# Altium PCB Copy of UniversalBoard.PcbDoc (part 2 of 2)
Units mm, origin at the board's own origin, x right, y up, seen from the top; angles counter-clockwise.
Board outline 150 x 100 mm, 2 copper layers (Top Layer, Bottom Layer); 74 components, 82 nets, 428 pads, 86 vias.
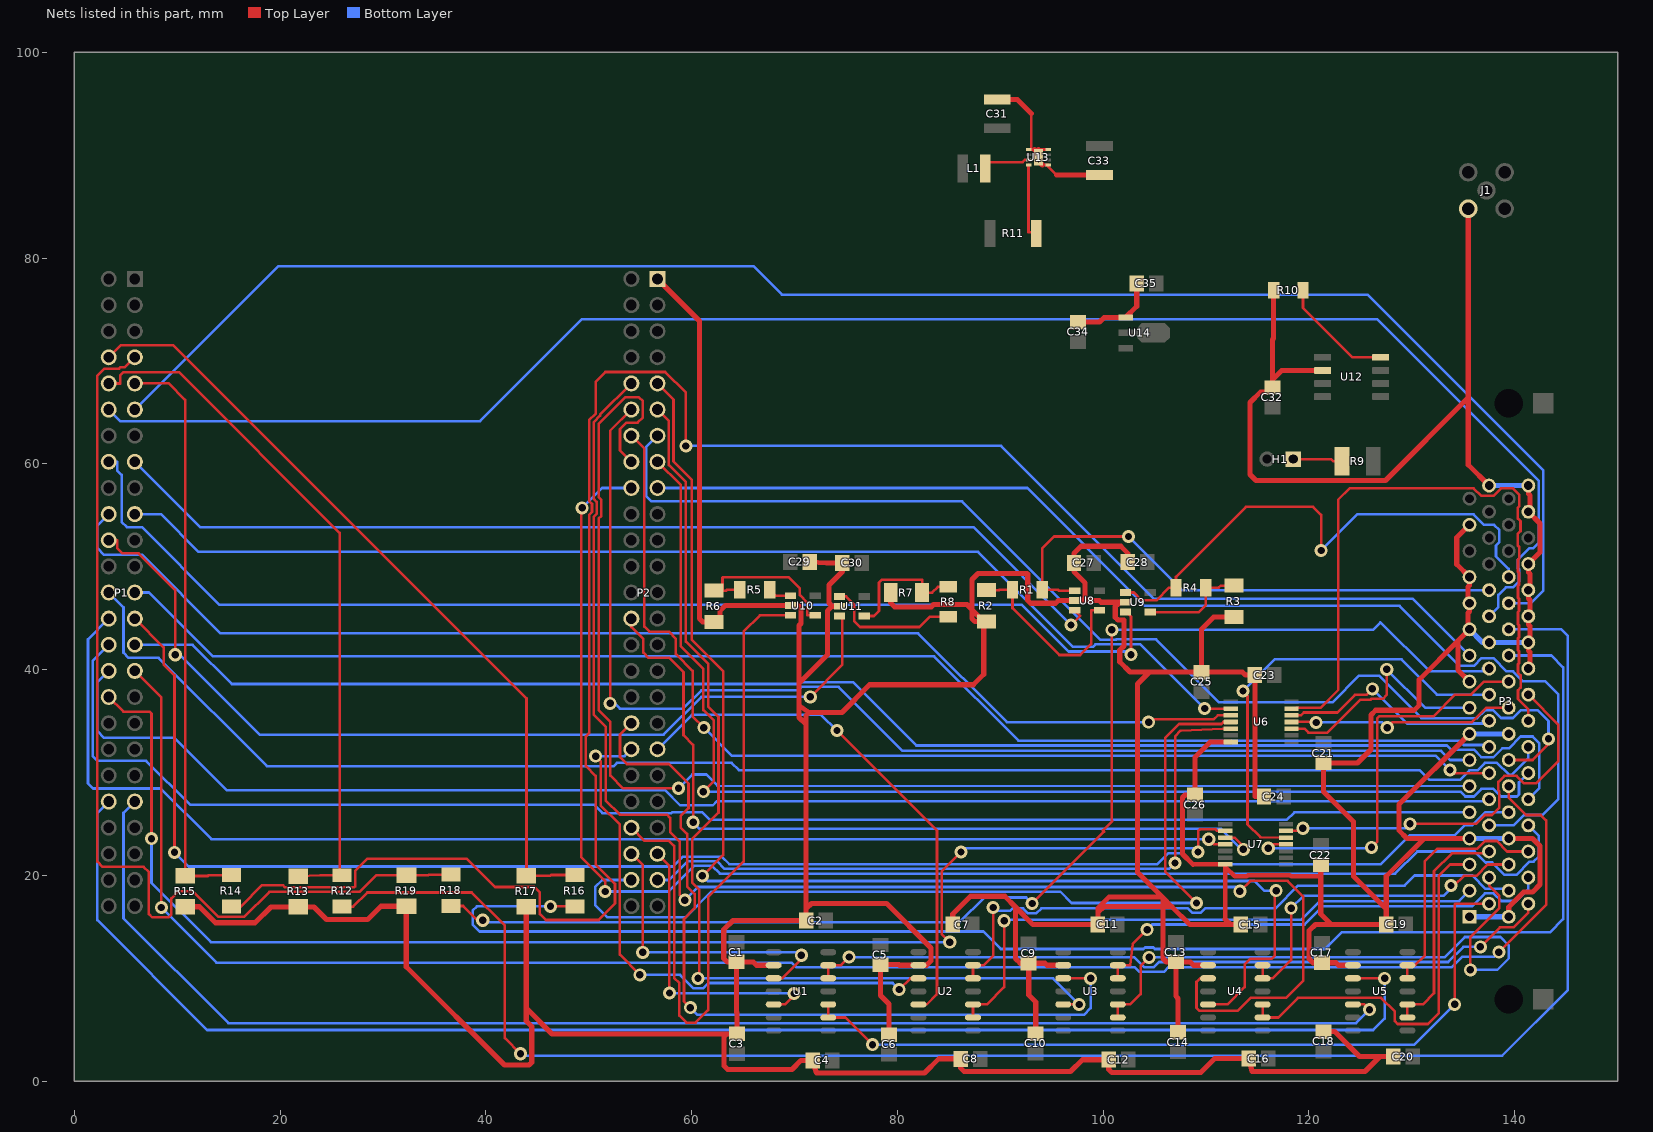
[diagram p2: the nets of this part, all layers, seen from the top]

## Via types
v1: diameter 1.27, hole 0.711, Top Layer to Bottom Layer, 79 vias
v2: diameter 1.8, hole 1.2, Top Layer to Bottom Layer, 5 vias
v3: diameter 0.5, hole 0.2, Top Layer to Bottom Layer, 2 vias

## Nets (pads, with @x,y where several pads share a name; then routed paths per layer and width w, separated by ;. In a path a pad name is that pad's centre, name@x,y a point inside that pad or via, vN(x,y) a via of type N, cw(c..) or ccw(c..) an arc to the next point about the centre after c; other vN are vias at no path point) (continued)
GND: C1.2 C2.2 C3.2 C4.2 C5.2 C6.2 C7.2 C8.2 C9.2 C10.2 C11.2 C12.2 C13.2 C14.2 C15.2 C16.2 C17.2 C18.2 C19.2 C20.2 C21.2 C22.2 C23.2 C24.2 C25.2 C26.2 C27.2 C28.2 C29.1 C30.2 C31.2 C32.2 C33.2 C34.1 C35.1 J1.3 P2.1 P3.1 P3.7 P3.15 P3.19 P3.22 P3.23 P3.25 P3.27 P3.31 P3.34 P3.35 P3.41 P3.49 P3.54 P3.56 P3.58 P3.60 P3.62 P3.66 P3.68 R2.2 R3.2 R6.2 R7.2 R10.2 R13.2 R15.2 R17.2 R19.2 U1.2 U2.2 U3.2 U4.2 U5.2 U6.7 U7.7 U8.2 U9.2 U10.2 U11.2 U12.2 U13.1 U13.4 U13.5 U13.9 U14.1 | length 819.7
  Top Layer w0.28: U13.5@92.758,90.553 U13.5@93.002,90.553 ; 93.002,94.069 U13.5@93.002,90.553 ; U13.9@93.318,90.553 U13.5@93.002,90.553 ; U13.9@93.708,90.576 94.539,90.576 94.539,90.553 U13.4@94.658,90.553 ; U13.9@94.106,89.053 U13.1@94.64,89.053 ; U13.1@94.658,89.053 U13.1@94.64,89.053 ; 95.45,88.09 94.64,88.9 U13.1@94.64,89.053
  Top Layer w0.45: 108.712,21.08 U7.7@111.862,21.08 ; 110.404,32.97 U6.7@112.4,32.97 ; 111.862,15.748 111.862,20.82 ; U7.7@111.87,21.08 U7.7@111.862,21.08 ; 121.15,19.906 118.275,19.906 118.147,20.034 114.072,20.034 113.943,19.906 112.776,19.906 111.862,20.82 ; 111.862,20.82 U7.7@111.862,21.08
  Top Layer w0.5: R15.2@10.77,16.95 12.157,16.95 13.711,15.396 17.557,15.396 19.101,16.94 R13.2@21.78,16.94 23.294,16.94 24.511,15.723 28.507,15.723 29.794,17.01 R19.2@32.258,17.01 ; R19.2@32.28,17.01 R19.2@32.258,17.01 ; R17.2@43.94,16.97 43.917,16.97 43.917,7.112 ; P2.1@56.678,77.981 60.757,73.902 60.757,44.958 61.08,44.635 R6.2@62.148,44.635 62.738,44.635 62.738,45.695 63.273,46.23 U10.2@69.612,46.23 70.381,46.23 70.637,45.974 70.637,44.501 70.434,44.298 70.434,38.684 ; U1.2@67.97,11.272 66.307,11.272 65.989,11.589 C1.2@64.35,11.589 ; C29.1@71.468,50.483 73.103,50.38 C30.2@74.65,50.38 74.65,49.53 73.355,48.235 73.355,46.475 73.66,46.17 ; U11.2@74.361,46.17 73.66,46.17 ; C6.2@79.18,4.521 79.18,7.493 78.35,8.323 C5.2@78.35,11.339 80.162,11.339 80.23,11.272 U2.2@82.044,11.272 82.829,11.272 83.269,11.712 83.269,12.954 78.951,17.272 71.637,17.272 71.129,16.764 ; R7.2@79.348,47.48 79.348,46.482 79.729,46.101 83.287,46.101 83.515,46.33 86.747,46.33 87.249,45.828 ; C7.2@85.369,15.22 85.369,16.256 87.089,17.976 90.424,17.976 91.465,16.935 ; R2.2@88.638,44.685 R2.2@88.392,44.685 ; C31.2@89.7,95.42 91.651,95.42 93.002,94.069 ; U13.9@93.318,90.553 93.701,90.17 93.701,89.459 U13.9@94.106,89.053 ; C10.2@93.44,4.621 93.44,7.696 92.76,8.376 C9.2@92.76,11.469 ; U13.9@93.708,89.803 v3(93.708,90.184) U13.9@93.708,90.576 ; 95.45,88.09 C33.2@99.63,88.09 ; U3.2@96.119,11.272 94.533,11.272 94.336,11.469 C9.2@92.76,11.469 ; C34.1@97.57,73.781 99.644,73.781 100.103,74.24 U14.1@102.18,74.24 103.256,75.316 C35.1@103.256,77.547 ; U9.2@102.169,46.55 101.49,46.55 ; C28.2@102.389,50.46 102.389,51.308 101.703,51.994 97.845,51.994 97.159,51.308 C27.2@97.159,50.38 97.159,49.526 98.247,48.438 98.247,46.99 97.977,46.72 ; C14.2@107.28,4.751 107.28,8.052 107.06,8.272 C13.2@107.06,11.599 ; 108.712,21.08 107.696,22.096 107.696,27.577 107.95,27.831 C26.2@108.93,27.831 108.93,31.496 110.404,32.97 ; U4.2@110.193,11.272 108.786,11.272 108.458,11.599 C13.2@107.06,11.599 ; 111.862,15.748 112.39,15.22 ; R3.2@112.7,45.125 110.744,45.125 109.57,43.951 C25.2@109.57,39.771 ; C15.2@113.359,15.22 112.39,15.22 ; C24.2@115.629,27.67 114.739,27.67 C23.2@114.739,39.473 113.818,39.473 113.52,39.771 C25.2@109.57,39.771 ; R10.2@116.565,76.88 116.565,72.203 116.447,72.085 116.447,68.182 ; C22.2@121.15,21.019 121.15,19.906 121.15,16.256 122.166,15.24 ; U12.2@121.325,69.083 117.348,69.083 116.447,68.182 ; C18.2@121.43,4.821 122.496,4.821 124.917,2.4 126.898,2.4 ; U5.2@124.267,11.272 122.879,11.272 122.631,11.519 C17.2@121.25,11.519 120.396,11.519 120.015,11.9 120.015,14.63 120.625,15.24 122.166,15.24 ; C20.2@128.199,2.4 126.898,2.4 ; v2(135.484,84.81) 135.484,66.447 ; P3.7@135.605,23.6 131.194,23.6 ; P3.15@135.605,33.76 128.734,26.889 128.734,24.384 129.519,23.6 131.194,23.6 ; P3.19@135.605,38.84 134.468,39.977 134.468,42.782 ; P3.31@135.605,54.08 134.366,52.841 134.366,50.239 P3.27@135.605,49 135.605,48.201 135.443,48.039 135.443,46.622 P3.25@135.605,46.46 135.605,45.661 135.443,45.499 135.443,44.082 P3.23@135.605,43.92 134.468,42.782 ; P3.34@137.51,57.89 135.484,59.915 135.484,66.447 ; P3.35@139.415,15.98 139.415,16.929 140.364,17.878 140.364,17.885 140.854,18.375 141.732,18.375 142.469,19.111 142.469,22.86 141.729,23.6 P3.41@139.415,23.6 ; P3.54@141.32,40.11 141.482,40.272 141.482,41.689 141.32,41.851 P3.56@141.32,42.65 141.482,42.812 141.482,44.229 141.32,44.391 P3.58@141.32,45.19 141.482,45.352 141.482,46.769 141.32,46.931 P3.60@141.32,47.73 141.482,47.892 141.482,49.309 141.32,49.471 P3.62@141.32,50.27 142.469,51.418 142.469,54.201 P3.66@141.32,55.35 141.482,55.512 141.482,56.929 141.32,57.091 P3.68@141.32,57.89 ; R19.2@32.258,17.01 32.258,11.125 41.808,1.575 44.196,1.575 44.45,1.829 44.45,5.309 43.917,5.842 43.917,7.112 ; 43.917,7.112 46.437,4.592 63.418,4.592 ; 63.418,4.592 C3.2@64.39,4.592 64.39,6.655 64.35,6.695 C1.2@64.35,11.589 ; 63.418,4.592 63.144,4.318 63.144,1.499 63.5,1.143 69.75,1.143 70.637,2.03 C4.2@71.759,2.03 72.14,0.787 82.631,0.787 84.023,2.18 C8.2@86.159,2.18 86.159,1.27 86.489,0.94 96.825,0.94 97.975,2.09 C12.2@100.539,2.09 100.539,1.137 100.838,0.838 109.474,0.838 110.826,2.19 C16.2@114.159,2.19 114.464,0.94 125.438,0.94 126.898,2.4 ; C1.2@64.35,11.589 63.468,11.589 63.119,11.938 63.119,14.732 64.007,15.62 C2.2@71.129,15.62 71.129,16.764 ; 70.434,36.525 70.434,35.357 71.129,34.662 ; 70.434,36.525 71.409,35.839 ; 70.434,36.525 70.434,38.684 ; 70.434,38.684 73.203,41.453 73.203,45.72 73.653,46.17 73.66,46.17 ; 71.129,16.764 71.129,34.662 ; 71.129,34.662 71.129,35.56 71.409,35.839 ; 71.409,35.839 74.6,35.839 77.292,38.532 87.376,38.532 88.392,39.548 R2.2@88.392,44.685 ; 87.249,45.828 87.249,48.768 87.833,49.352 92.583,49.352 92.659,49.276 92.659,46.736 92.939,46.457 95.377,46.457 95.64,46.72 U8.2@97.239,46.72 97.977,46.72 ; 87.249,45.828 87.249,44.958 87.522,44.685 R2.2@88.392,44.685 ; 87.249,45.828 R2.2@88.392,44.685 ; 91.465,16.935 93.16,15.24 C11.2@99.479,15.24 99.479,16.37 ; 91.465,16.935 91.465,11.938 91.934,11.469 C9.2@92.76,11.469 ; 97.977,46.72 99.619,46.72 99.789,46.55 101.49,46.55 ; 99.479,16.37 99.479,16.815 100.584,17.92 105.719,17.92 ; 99.479,16.37 100.076,16.967 105.816,16.967 ; 101.49,46.55 101.49,46.375 101.432,46.375 101.169,46.111 101.169,45.089 101.432,44.825 102.016,44.825 102.016,42.311 101.614,41.909 101.614,40.773 102.616,39.771 104.49,39.771 ; 104.49,39.771 103.327,38.608 103.327,20.312 105.719,17.92 ; 104.49,39.771 C25.2@109.57,39.771 ; 105.719,17.92 105.816,17.823 ; 105.816,16.967 105.816,17.823 ; 105.816,16.967 105.816,11.938 106.155,11.599 C13.2@107.06,11.599 ; 105.816,16.967 106.672,16.967 ; 105.816,17.823 106.672,16.967 ; 106.672,16.967 108.419,15.22 112.39,15.22 ; 116.447,68.182 C32.2@116.447,67.427 116.447,67.005 115.316,67.005 114.276,65.965 114.276,58.972 114.853,58.395 127.432,58.395 135.484,66.447 ; 122.166,15.24 C19.2@127.509,15.24 127.509,16.737 ; 127.509,16.737 127.509,19.915 131.194,23.6 ; 127.509,16.737 124.333,19.914 124.333,25.22 121.41,28.143 C21.2@121.41,30.939 124.714,30.939 126.025,32.25 126.025,35.592 126.492,36.059 130.224,36.059 130.708,36.543 130.708,39.023 134.468,42.782
  Bottom Layer w0.5: P3.1@135.605,15.98 P3.35@139.415,15.98 ; P3.7@135.605,23.6 P3.41@139.415,23.6 ; P3.15@135.605,33.76 P3.49@139.415,33.76 ; P3.23@135.605,43.92 136.875,42.65 P3.22@137.51,42.65 P3.56@141.32,42.65 ; P3.34@137.51,57.89 P3.68@141.32,57.89
  other v3: 93.708,89.403
NetH1_1: H1.1 R9.2 | length 4.8
  Top Layer w0.254: H1.1@118.47,60.47 122.14,60.47 122.35,60.26 R9.2@123.195,60.26
NetL1_1: L1.1 U13.7 | length 4.9
  Top Layer w0.254: L1.1@88.54,88.72 88.54,89.332 92.177,89.332 92.398,89.553 U13.7@92.758,89.553
NetP1_7: P1.7 R18.1 R19.1 | length 95.3
  Top Layer w0.254: P1.7@5.878,70.361 4.894,69.377 4.459,69.377 4.322,69.24 2.896,69.24 2.235,68.58 2.235,21.336 2.743,20.828 6.731,20.828 7.239,20.32 7.239,16.256 7.569,15.926 9.144,15.926 9.423,16.205 9.423,17.78 10.109,18.466 11.503,18.466 13.995,15.973 16.51,15.973 18.946,18.409 27.723,18.409 29.324,20.01 R19.1@32.28,20.01 34.392,20.01 34.467,20.085 R18.1@36.6,20.085
NetP1_8: P1.8 R16.1 R17.1 | length 77.3
  Top Layer w0.254: P1.8@3.338,70.361 4.529,71.552 9.601,71.552 43.942,37.211 R17.1@43.942,19.97 ; R17.1@43.94,19.97 R17.1@43.942,19.97 ; R16.1@48.65,20.045 46.328,20.045 46.253,19.97 R17.1@43.942,19.97
NetP1_9: P1.9 R14.1 R15.1 | length 56.4
  Top Layer w0.254: P1.9@5.878,67.821 5.878,67.843 9.144,67.843 10.77,66.218 R15.1@10.77,19.95 12.954,19.95 13.029,20.025 R14.1@15.25,20.025
NetP1_10: P1.10 R12.1 R13.1 | length 67.4
  Top Layer w0.254: P1.10@3.338,67.821 4.47,67.821 4.47,68.618 4.775,68.923 10.16,68.923 25.781,53.302 R12.1@25.781,20.015 ; R13.1@21.78,19.94 23.926,20.015 R12.1@25.781,20.015 ; R12.1@26.03,20.015 R12.1@25.781,20.015
NetP1_11: P1.11 P3.59 | length 166.5
  Bottom Layer w0.254: P1.11@5.878,65.281 19.82,79.223 66.015,79.223 68.783,76.454 125.705,76.454 142.776,59.383 142.776,47.678 141.557,46.46 P3.59@139.415,46.46
NetP1_12: P1.12 P3.24 | length 165.9
  Bottom Layer w0.254: P1.12@3.338,65.281 4.459,64.16 39.446,64.16 49.352,74.066 126.619,74.066 142.322,58.363 142.322,52.324 141.814,51.816 141.449,51.816 140.318,50.685 140.318,49.855 140.417,49.756 140.417,48.585 139.83,47.998 139.137,47.998 138.405,47.265 138.405,46.084 P3.24@137.51,45.19
NetP1_15: P1.15 U8.3 | length 99.6
  Top Layer w0.254: v1(96.876,44.348) 97.769,45.241 U8.3@97.239,45.77
  Bottom Layer w0.254: P1.15@5.878,60.201 12.231,53.848 87.376,53.848 v1(96.876,44.348)
NetP1_16: P1.16 U9.3 | length 114.7
  Top Layer w0.254: U9.3@102.169,45.6 102.26,45.6 102.699,45.162 v1(102.699,41.46)
  Bottom Layer w0.254: P1.16@3.338,60.201 4.166,60.201 4.166,59.36 4.597,58.928 4.597,54.356 5.105,53.848 6.579,53.848 14.122,46.304 92.088,46.304 96.628,41.764 102.14,41.764 102.444,41.46 v1(102.699,41.46)
NetP1_19: P1.19 U6.2 | length 114.6
  Top Layer w0.254: v1(109.855,36.22) U6.2@112.4,36.22
  Bottom Layer w0.254: P1.19@5.878,55.121 8.404,55.121 12.065,51.46 87.836,51.46 97.079,42.218 99.009,42.218 99.245,42.454 101.426,42.454 101.458,42.486 103.589,42.486 v1(109.855,36.22)
NetP1_20: P1.20 U6.3 | length 121.2
  Top Layer w0.254: v1(104.419,34.9) 104.698,35.178 110.744,35.178 111.136,35.57 U6.3@112.4,35.57
  Bottom Layer w0.254: P1.20@3.338,55.121 2.235,54.018 2.235,51.816 2.896,51.156 6.604,51.156 14.224,43.536 82.017,43.536 90.653,34.9 v1(104.419,34.9)
NetP1_22: P1.22 U11.3 | length 91.1
  Top Layer w0.254: P1.22@3.338,52.581 4.166,52.581 4.166,51.816 4.674,51.308 6.248,51.308 9.804,47.752 v1(9.804,41.453) ; v1(71.526,37.363) 74.625,40.462 74.625,45.22 U11.3@74.361,45.22
  Bottom Layer w0.254: v1(9.804,41.453) 10.236,41.453 18.009,33.68 57.277,33.68 60.96,37.363 v1(71.526,37.363)
NetP1_25: P1.25 P3.14 | length 138
  Bottom Layer w0.254: P1.25@5.878,47.501 7.254,47.501 13.455,41.3 83.566,41.3 91.77,33.096 134.614,33.096 135.034,32.676 137.011,32.676 137.011,32.49 P3.14@137.51,32.49
NetP1_26: P1.26 P3.48 | length 151.3
  Bottom Layer w0.254: P1.26@3.338,47.501 4.775,46.064 4.775,41.656 5.283,41.148 8.179,41.148 18.699,30.628 52.432,30.628 52.74,30.937 63.881,30.937 64.592,30.226 130.755,30.226 131.692,29.289 134.668,29.289 135.596,30.218 136.361,30.218 137.095,30.952 138.266,30.952 139.423,29.794 139.718,29.794 141.32,31.396 P3.48@141.32,32.49
NetP1_27: P1.27 P3.43 | length 158.3
  Top Layer w0.254: P1.27@5.878,44.961 8.68,42.159 8.68,40.491 9.728,39.442 v1(9.728,22.25)
  Bottom Layer w0.254: v1(9.728,22.25) 11.106,20.872 58.204,20.872 59.166,21.834 62.906,21.834 63.652,21.088 105.267,21.088 106.35,22.171 107.626,22.171 108.709,21.088 126.981,21.088 129.781,23.888 134.149,23.888 135.153,24.892 135.876,24.892 137.124,26.14 P3.43@139.415,26.14
NetP1_28: P1.28 U7.4 | length 129.8
  Top Layer w0.254: v1(110.261,23.52) 110.752,23.03 U7.4@111.87,23.03
  Bottom Layer w0.254: P1.28@3.338,44.961 1.321,42.944 1.321,28.956 1.829,28.448 8.382,28.448 13.31,23.52 v1(110.261,23.52)
NetP1_29: P1.29 P3.44 | length 148.2
  Bottom Layer w0.254: P1.29@5.878,42.421 11.492,42.421 15.305,38.608 70.244,38.608 70.416,38.779 75.69,38.779 81.84,32.629 133.42,32.629 133.827,32.222 136.02,32.222 136.754,31.488 137.925,31.488 138.786,32.348 139.421,32.348 140.575,33.503 141.732,33.503 142.39,32.844 142.39,28.48 P3.44@141.32,27.41
NetP1_30: P1.30 P3.9 | length 148.2
  Bottom Layer w0.254: P1.30@3.338,42.421 1.778,40.861 1.778,31.598 2.235,31.14 6.985,31.14 11.252,26.873 50.521,26.873 51.333,26.06 58.027,26.06 58.122,26.155 61.014,26.155 61.77,25.4 117.837,25.4 118.576,26.14 P3.9@135.605,26.14
NetP1_31: P1.31 P3.45 | length 177.8
  Top Layer w0.254: P1.31@5.878,39.881 8.458,37.301 v1(8.458,16.891) ; v1(138.455,12.548) 143.053,17.145 143.053,25.338 142.519,25.872 141.1,25.872 139.415,27.557 P3.45@139.415,28.68
  Bottom Layer w0.254: v1(8.458,16.891) 13.818,11.532 69.716,11.532 70.17,11.078 103.054,11.078 103.508,10.624 105.886,10.624 106.34,11.078 133.879,11.078 134.885,12.084 137.992,12.084 v1(138.455,12.548)
NetP1_32: P1.32 P3.10 | length 144.8
  Bottom Layer w0.254: P1.32@3.338,39.881 2.235,38.778 2.235,34.036 2.896,33.376 9.728,33.376 14.808,28.296 57.407,28.296 58.88,26.822 62.049,26.822 62.43,27.203 137.304,27.203 P3.10@137.51,27.41
NetP1_34: P1.34 U7.2 | length 139.3
  Top Layer w0.254: P1.34@3.338,37.341 4.763,35.916 7.315,35.916 7.493,35.738 v1(7.493,23.571) ; v1(85.087,13.513) 84.3,14.3 84.3,20.394 v1(86.182,22.276) ; v1(109.22,22.276) 109.22,24.308 109.398,24.486 110.922,24.486 111.077,24.33 U7.2@111.87,24.33
  Bottom Layer w0.254: v1(7.493,23.571) 7.493,19.279 13.259,13.513 v1(85.087,13.513) ; v1(86.182,22.276) 86.531,22.625 108.871,22.625 v1(109.22,22.276)
NetP1_41: P1.41 U5.5 | length 139.5
  Top Layer w0.254: U5.5@124.267,7.462 125.374,7.462 v1(125.882,6.954)
  Bottom Layer w0.254: P1.41@5.878,27.181 4.775,26.078 4.775,15.824 14.961,5.639 124.568,5.639 v1(125.882,6.954)
NetP1_42: P1.42 U5.3 | length 149
  Top Layer w0.254: U5.3@124.267,10.002 v1(127.356,10.002)
  Bottom Layer w0.254: P1.42@3.338,27.181 2.235,26.078 2.235,15.646 12.903,4.978 126.238,4.978 127.356,6.096 v1(127.356,10.002)
NetP2_9: P2.9 U4.5 | length 123.8
  Top Layer w0.254: P2.9@56.678,67.821 58.234,66.265 58.234,60.232 59.995,58.471 59.995,42.926 63.059,39.862 63.059,21.987 v1(61.036,19.964) ; U4.5@110.193,7.462 112.059,7.462 113.741,9.144 113.741,11.354 114.3,11.913 116.383,11.913 116.662,12.192 116.662,18.372 v1(116.81,18.52)
  Bottom Layer w0.254: v1(61.036,19.964) 61.544,19.456 114.706,19.456 115.643,18.52 v1(116.81,18.52)
NetP2_10: P2.10 U4.3 | length 143.8
  Top Layer w0.254: P2.10@54.138,67.821 51.112,64.795 51.112,64.683 50.496,64.067 50.496,56.586 50.768,56.314 50.768,55.141 50.496,54.869 50.496,35.611 51.638,34.469 51.638,27.301 53.032,25.908 57.582,25.908 57.905,25.584 57.905,24.231 58.826,23.31 58.826,18.11 v1(59.334,17.602) ; U4.3@110.193,10.002 109.417,10.002 109.068,9.652 109.068,7.112 109.347,6.833 113.055,6.833 114.325,8.103 117.78,8.103 119.431,9.754 119.431,17.969 117.918,19.482 114.3,19.482 v1(113.284,18.466)
  Bottom Layer w0.254: v1(59.334,17.602) 60.604,18.872 112.878,18.872 v1(113.284,18.466)
NetP2_11: P2.11 U3.5 | length 98.8
  Top Layer w0.254: P2.11@56.678,65.281 57.78,64.179 57.78,59.898 59.436,58.242 59.436,42.723 61.62,40.538 61.62,36.392 62.605,35.408 62.605,26.108 60.046,23.549 60.046,19.304 60.75,18.599 60.75,10.141 v1(60.611,10.001) ; U3.5@96.119,7.462 v1(97.663,7.462)
  Bottom Layer w0.254: v1(60.611,10.001) 95.123,10.001 v1(97.663,7.462)
NetP2_12: P2.12 P3.13 | length 117
  Top Layer w0.254: v1(52.08,36.73) 52.08,63.223 P2.12@54.138,65.281
  Bottom Layer w0.254: v1(52.08,36.73) 52.526,36.73 53.035,36.22 59.175,36.22 60.953,37.998 70.361,37.998 70.688,38.325 74.273,38.325 80.493,32.106 132.842,32.106 133.728,31.22 P3.13@135.605,31.22
NetP2_13: P2.13 P3.47 | length 113.2
  Top Layer w0.254: P3.47@139.415,31.22 141.732,31.22 143.281,32.769 v1(143.281,33.274)
  Bottom Layer w0.254: P2.13@56.678,62.741 55.575,61.638 55.575,56.896 56.109,56.363 86.287,56.363 99.742,42.908 101.238,42.908 101.27,42.94 105.142,42.94 111.252,36.83 122.272,36.83 124.87,39.428 126.794,39.428 130.941,35.281 136.344,35.281 137.106,36.043 137.914,36.043 138.659,35.298 139.83,35.298 140.575,36.043 142.24,36.043 143.281,35.001 v1(143.281,33.274)
NetP2_14: P2.14 P3.12 | length 110.5
  Top Layer w0.254: P2.14@54.138,62.741 55.397,61.482 55.397,44.196 55.905,43.688 57.785,43.688 58.471,43.002 58.471,41.501 60.096,39.875 60.096,35.458 v1(61.189,34.366) ; v1(133.706,30.251) 134.007,29.95 P3.12@137.51,29.95
  Bottom Layer w0.254: v1(61.189,34.366) 63.925,31.629 132.328,31.629 v1(133.706,30.251)
NetP2_15: P2.15 P3.46 | length 117.4
  Top Layer w0.254: P2.15@56.678,60.201 58.943,57.936 58.943,42.267 61.138,40.072 61.138,36.065 62.151,35.052 62.151,29.156 v1(61.138,28.143)
  Bottom Layer w0.254: v1(61.138,28.143) 134.724,28.143 135.19,27.678 136.02,27.678 136.754,28.412 137.925,28.412 138.659,27.678 140.22,27.678 140.417,27.874 140.417,29.047 P3.46@141.32,29.95
NetP2_16: P2.16 P3.11 | length 133.3
  Top Layer w0.254: P2.16@54.138,60.201 53.036,61.303 53.036,63.374 53.67,64.008 54.737,64.008 55.245,64.516 55.245,66.091 54.864,66.472 53.543,66.472 50.95,63.879 50.95,56.774 51.222,56.502 51.222,54.953 50.95,54.681 50.95,36.065 52.095,34.92 52.095,29.718 53.34,28.473 v1(58.725,28.473)
  Bottom Layer w0.254: v1(58.725,28.473) 60.068,29.816 61.42,29.816 62.509,28.727 135.153,28.68 P3.11@135.605,28.68
NetP2_17: P2.17 P3.8 | length 114.4
  Bottom Layer w0.254: P2.17@56.678,57.661 92.622,57.661 104.081,46.203 128.815,46.203 134.64,40.378 136.02,40.378 136.754,41.112 137.925,41.112 139.195,39.842 139.83,39.842 140.81,38.862 142.977,38.862 144.247,37.592 144.247,27.432 142.686,25.872 140.905,25.872 139.903,24.87 P3.8@137.51,24.87
NetP2_18: P2.18 P3.42 | length 142
  Top Layer w0.254: v1(49.352,55.728) 49.257,55.632 49.257,21.787 51.587,19.456 v1(51.587,18.44)
  Bottom Layer w0.254: v1(49.352,55.728) 51.286,57.661 P2.18@54.138,57.661 ; v1(51.587,18.44) 57.734,18.44 60.22,20.926 61.998,20.926 62.744,20.18 128.384,20.18 130.531,22.327 136.096,22.327 137.163,21.26 137.798,21.26 139,20.058 140.171,20.058 141.449,21.336 141.834,21.336 142.342,21.844 142.342,23.848 P3.42@141.32,24.87
NetP2_28: P2.28 U7.3 | length 80.4
  Top Layer w0.254: P2.28@54.138,44.961 54.138,44.145 55.296,42.987 55.296,41.656 55.804,41.148 57.836,41.148 59.207,39.776 59.207,33.63 60.141,32.696 v1(60.141,25.171) ; U7.3@111.87,23.68 112.776,23.68 113.62,22.836 v1(113.62,22.54)
  Bottom Layer w0.254: v1(60.141,25.171) 60.776,24.536 111.455,24.536 113.452,22.54 v1(113.62,22.54)
NetP2_36: P2.36 U3.3 | length 79.9
  Top Layer w0.254: P2.36@54.138,34.801 53.035,33.698 53.035,31.496 53.696,30.836 57.785,30.836 59.687,28.934 59.687,26.54 58.928,25.781 58.928,24.663 59.563,24.028 59.563,18.945 60.296,18.212 60.296,16.832 59.254,15.79 59.254,7.764 v1(59.868,7.15) ; U3.3@96.119,10.002 v1(98.781,10.002)
  Bottom Layer w0.254: v1(59.868,7.15) 60.566,6.452 98.12,6.452 98.781,7.112 v1(98.781,10.002)
NetP2_37: P2.37 U2.5 | length 51.3
  Top Layer w0.254: v1(74.117,34.087) 83.846,24.358 83.846,8.459 82.849,7.462 U2.5@82.044,7.462
  Bottom Layer w0.254: P2.37@56.678,32.261 60.028,35.611 72.593,35.611 v1(74.117,34.087)
NetP2_38: P2.38 U2.3 | length 55.3
  Top Layer w0.254: v1(50.673,31.598) 51.156,31.115 51.156,26.797 53.01,24.943 53.01,12.294 v1(54.966,10.338) ; v1(80.162,8.915) 81.249,10.002 U2.3@82.044,10.002
  Bottom Layer w0.254: v1(50.673,31.598) 53.475,31.598 P2.38@54.138,32.261 ; v1(54.966,10.338) 58.874,10.338 60.192,9.02 61.084,9.02 61.611,9.547 79.531,9.547 v1(80.162,8.915)
NetP2_44: P2.44 U10.3 | length 68.6
  Top Layer w0.254: P2.44@54.138,24.641 55.411,23.368 57.785,23.368 58.293,22.86 58.293,10.032 58.8,9.525 58.8,6.377 59.488,5.69 60.376,5.69 61.595,6.909 61.595,17.882 65.049,21.336 65.049,43.688 66.641,45.28 U10.3@69.612,45.28
NetP2_45: P2.45 U1.5 | length 28.7
  Top Layer w0.254: P2.45@56.678,22.101 57.838,20.941 v1(57.838,8.566) ; U1.5@67.97,7.462 69.088,7.462 69.96,8.334 v1(69.96,8.52)
  Bottom Layer w0.254: v1(57.838,8.566) 57.861,8.543 69.937,8.543 v1(69.96,8.52)
NetP2_46: P2.46 U1.3 | length 29.4
  Top Layer w0.254: P2.46@54.138,22.101 55.245,20.994 v1(55.245,12.522) ; U1.3@67.97,10.002 68.803,10.002 70.663,11.862 v1(70.663,12.243)
  Bottom Layer w0.254: v1(55.245,12.522) 70.383,12.522 v1(70.663,12.243)
NetP2_47: P2.47 U6.5 | length 69.6
  Top Layer w0.254: v1(106.985,21.209) 106.985,33.528 107.524,34.067 111.616,34.27 U6.5@112.4,34.27
  Bottom Layer w0.254: P2.47@56.678,19.561 57.801,19.561 59.62,21.38 62.452,21.38 63.198,20.634 106.41,20.634 v1(106.985,21.209)
NetP2_48: P2.48 U6.4 | length 90.3
  Top Layer w0.254: v1(109.068,17.323) 106.02,20.371 106.02,33.376 107.366,34.722 111.481,34.722 111.679,34.92 U6.4@112.4,34.92
  Bottom Layer w0.254: P2.48@54.138,19.561 51.308,19.561 50.622,18.875 50.622,17.113 51.816,15.919 59.404,15.919 61.9,18.415 95.834,18.415 96.926,17.323 v1(109.068,17.323)
NetP3_2: P3.2 U1.9 U1.10 | length 78
  Top Layer w0.254: U1.10@73.27,7.462 U1.9@73.27,6.192 74.936,6.192 v1(77.572,3.556) ; v1(134.163,7.468) 134.163,17.174 134.239,17.25 P3.2@137.51,17.25
  Bottom Layer w0.254: v1(77.572,3.556) 130.251,3.556 v1(134.163,7.468)
NetP3_3: P3.3 U2.9 U2.10 | length 57.9
  Top Layer w0.254: U2.9@87.344,6.192 U2.10@87.344,7.462 88.691,7.462 90.373,9.144 v1(90.373,15.596)
  Bottom Layer w0.254: v1(90.373,15.596) 90.475,15.697 119.278,15.697 121.082,17.501 134.586,17.501 P3.3@135.605,18.52
NetP3_4: P3.4 U3.9 U3.10 | length 59.9
  Top Layer w0.254: U3.9@101.419,6.192 U3.10@101.419,7.462 102.616,7.462 103.632,8.478 103.632,11.201 v1(104.47,12.04) ; v1(135.687,10.82) 135.687,14.01 138.512,16.835 138.512,18.006 137.51,19.008 P3.4@137.51,19.79
  Bottom Layer w0.254: v1(104.47,12.04) 133.172,12.04 135.15,14.018 138.608,14.018 139.417,13.208 139.417,11.938 138.3,10.82 v1(135.687,10.82)
NetP3_5: P3.5 U4.9 U4.10 | length 38
  Top Layer w0.254: U4.10@115.493,7.462 U4.9@115.493,6.192 117.018,6.192 118.929,8.103 127,8.103 128.346,6.756 128.346,5.842 128.626,5.563 131.572,5.563 132.61,6.601 132.61,19.95 133.72,21.06 P3.5@135.605,21.06
NetP3_6: P3.6 U5.9 U5.10 | length 22.4
  Top Layer w0.254: U5.9@129.567,6.192 U5.10@129.567,7.462 131.064,7.462 132.156,8.554 132.156,20.415 133.885,22.144 137.011,22.144 137.011,22.33 P3.6@137.51,22.33
NetP3_16: P3.16 U6.12 | length 21.9
  Top Layer w0.254: U6.12@118.3,35.57 119.231,35.57 119.497,35.836 122.77,35.836 124.478,37.544 125.571,37.544 v1(126.162,38.135)
  Bottom Layer w0.254: v1(126.162,38.135) 129.525,34.773 136.906,34.773 136.906,35.03 P3.16@137.51,35.03
NetP3_17: P3.17 U6.10 | length 23
  Top Layer w0.254: U6.10@118.3,34.27 119.552,34.27 119.939,33.884 121.78,33.884 124.987,37.09 125.987,37.09 126.065,37.168 127.178,37.168 127.559,37.549 v1(127.559,40.03)
  Bottom Layer w0.254: v1(127.559,40.03) 131.289,36.3 P3.17@135.605,36.3
NetP3_18: P3.18 U7.12 | length 44
  Top Layer w0.254: v1(113.589,37.922) 114.021,37.49 114.021,24.975 115.281,23.715 117.197,23.68 U7.12@117.77,23.68
  Bottom Layer w0.254: v1(113.589,37.922) 116.662,40.996 129.007,40.996 132.432,37.57 P3.18@137.51,37.57
NetP3_20: P3.20 R18.2 | length 128.2
  Top Layer w0.254: R18.2@36.6,17.035 37.795,17.035 39.692,15.138 v1(39.692,15.646) ; v1(93.091,17.272) 100.076,24.257 99.966,24.367 100.89,25.29 100.84,25.341 v1(100.84,43.87)
  Bottom Layer w0.254: v1(39.692,15.646) 39.873,15.465 86.052,15.465 88.44,17.853 92.51,17.853 v1(93.091,17.272) ; v1(100.84,43.87) 126.21,43.87 126.942,44.602 131.692,39.853 136.881,39.853 136.881,40.11 P3.20@137.51,40.11
NetP3_21: P3.21 R14.2 | length 196.9
  Top Layer w0.254: R14.2@15.25,16.975 16.18,16.975 18.255,19.05 20.26,19.05 20.447,18.863 27.22,18.863 27.305,18.948 27.305,20.472 28.448,21.615 38.145,21.615 40.888,18.872 44.704,18.872 45.237,18.339 45.237,16.256 45.822,15.672 50.952,15.672 52.553,17.272 52.553,19.177 50.658,21.072 50.658,29.681 49.711,30.628 49.711,33.519 50.024,33.832 50.042,33.832 50.042,55.057 50.314,55.329 50.314,56.126 50.042,56.398 50.042,64.255 50.658,64.871 50.658,67.981 51.613,68.936 57.429,68.936 59.436,66.929 v1(59.436,61.747)
  Bottom Layer w0.254: v1(59.436,61.747) 90.068,61.747 104.924,46.892 130.093,46.892 P3.21@135.605,41.38
NetP3_26: P3.26 R1.1 U8.1 | length 53.3
  Top Layer w0.254: U8.1@97.239,47.67 95.706,47.67 95.606,47.77 R1.1@94.088,47.77 94.088,51.816 95.213,52.94 v1(102.457,52.94)
  Bottom Layer w0.254: v1(102.457,52.94) 107.667,47.73 P3.26@137.51,47.73
NetP3_36: P3.36 U1.12 U1.13 | length 73.1
  Top Layer w0.254: U1.12@73.27,10.002 U1.13@73.27,11.272 74.518,11.272 v1(75.311,12.065) ; v1(136.652,13.056) 138.557,14.961 139.903,14.961 141.32,16.377 P3.36@141.32,17.25
  Bottom Layer w0.254: v1(75.311,12.065) 102.997,12.065 103.984,11.078 104.931,11.078 105.435,11.582 133.528,11.582 135.001,13.056 v1(136.652,13.056)
NetP3_37: P3.37 U2.12 U2.13 | length 61.6
  Top Layer w0.254: U2.12@87.344,10.002 U2.13@87.344,11.272 88.392,11.272 89.306,12.186 v1(89.306,16.891)
  Bottom Layer w0.254: v1(89.306,16.891) 89.306,16.558 90.957,16.558 91.2,16.8 92.203,16.8 92.693,16.31 93.489,16.31 93.979,16.8 108.23,16.8 108.669,16.361 109.466,16.361 109.905,16.8 116.749,16.8 118.948,18.999 129.286,18.999 130.277,19.99 135.893,19.99 137.177,18.706 139.229,18.706 P3.37@139.415,18.52
NetP3_38: P3.38 U3.12 U3.13 | length 46.9
  Top Layer w0.254: U3.12@101.419,10.002 U3.13@101.419,11.272 102.616,11.272 102.87,13.335 v1(104.267,14.732)
  Bottom Layer w0.254: v1(104.267,14.732) 104.765,15.23 119.573,15.23 121.336,16.993 135.836,16.993 137.095,18.252 137.958,18.252 138.692,17.518 140.167,17.518 141.32,18.671 P3.38@141.32,19.79
NetP3_39: P3.39 U4.12 U4.13 | length 32.9
  Top Layer w0.254: U4.13@115.493,11.272 U4.12@115.493,10.002 116.478,10.002 118.263,11.786 v1(118.263,16.815) ; v1(133.8,19.02) 134.107,19.02 135.052,19.964 136.267,19.964 137.363,21.06 P3.39@139.415,21.06
  Bottom Layer w0.254: v1(118.263,16.815) 119.456,18.009 133.096,18.009 133.8,18.713 v1(133.8,19.02)
NetP3_40: P3.40 U5.12 U5.13 | length 23.8
  Top Layer w0.254: U5.12@129.567,10.002 U5.13@129.567,11.272 130.321,11.272 131.242,12.192 131.242,21.336 132.504,22.598 136.361,22.598 137.106,23.343 138.255,23.343 139.268,22.33 P3.40@141.32,22.33
NetP3_50: P3.50 U6.13 | length 66.1
  Top Layer w0.254: U6.13@118.3,36.22 118.777,36.22 118.777,36.29 121.101,36.29 122.845,38.034 122.845,56.526 123.952,57.633 136.009,57.633 136.754,56.888 137.925,56.888 138.659,57.622 139.83,57.622 140.437,57.015 140.437,55.884 140.31,55.757 140.31,54.686 140.564,54.432 140.564,53.471 140.31,53.217 140.31,52.062 140.437,51.935 140.437,50.804 140.318,50.685 140.318,49.514 140.417,49.415 140.417,48.244 140.318,48.145 140.318,46.974 140.417,46.875 140.417,45.704 140.318,45.605 140.318,44.434 140.417,44.335 140.417,43.164 140.318,43.065 140.318,41.894 140.417,41.795 140.417,40.624 140.318,40.525 140.318,39.695 140.578,39.435 140.578,38.245 140.318,37.985 140.318,37.155 141.32,36.153 P3.50@141.32,35.03
NetP3_51: P3.51 U6.11 | length 22.1
  Top Layer w0.254: U6.11@118.3,34.92 120.655,34.92 v1(120.701,34.874) ; v1(127.61,34.366) 128.118,34.874 135.814,34.874 137.239,36.3 P3.51@139.415,36.3
  Bottom Layer w0.254: v1(120.701,34.874) 127.102,34.874 v1(127.61,34.366)
NetP3_52: P3.52 U7.13 | length 39.1
  Top Layer w0.254: U7.13@117.77,24.33 118.894,24.33 119.154,24.59 v1(119.4,24.59) ; v1(129.819,25.019) 136.242,25.019 137.095,25.872 137.779,25.872 138.512,26.604 138.512,28.166 138.413,28.265 138.413,29.095 139,29.682 140.171,29.682 140.905,28.948 142.054,28.948 144.247,31.14 144.247,34.643 P3.52@141.32,37.57
  Bottom Layer w0.254: v1(119.4,24.59) 129.39,24.59 v1(129.819,25.019)
NetP3_53: P3.53 U7.11 | length 39
  Top Layer w0.254: v1(116.04,22.64) 116.137,22.64 116.527,23.03 U7.11@117.77,23.03 ; v1(126.086,22.733) 126.644,23.292 126.644,35.281 126.822,35.458 132.105,35.458 134.214,37.567 135.749,37.567 137.022,38.84 P3.53@139.415,38.84
  Bottom Layer w0.254: v1(116.04,22.64) 125.993,22.64 v1(126.086,22.733)
NetP3_55: P3.55 R16.2 | length 150
  Top Layer w0.254: v1(46.279,16.993) 46.281,16.995 R16.2@48.65,16.995
  Bottom Layer w0.254: v1(46.279,16.993) 39.116,16.993 38.71,16.586 38.71,15.24 39.395,14.554 88.341,14.554 90.045,12.85 103.92,12.85 104.072,13.002 104.869,13.002 105.02,12.85 121.562,12.85 123.184,14.472 143.427,14.472 144.704,15.748 144.704,40.234 143.558,41.38 P3.55@139.415,41.38
NetP3_57: P3.57 R12.2 | length 175.7
  Top Layer w0.254: R12.2@26.03,16.965 27.1,16.965 28.473,18.339 38.608,18.339 41.834,15.113 41.834,4.191 v1(43.358,2.667)
  Bottom Layer w0.254: v1(43.358,2.667) 43.536,2.489 138.786,2.489 145.161,8.865 145.161,43.285 144.526,43.92 P3.57@139.415,43.92
NetP3_61: P3.61 R4.1 U9.1 | length 52.1
  Top Layer w0.254: U9.1@102.169,47.5 102.972,47.5 103.736,46.736 105.181,46.736 106.415,47.97 R4.1@107.07,47.97 107.07,49.022 113.877,55.829 120.396,55.829 121.183,55.042 v1(121.183,51.587)
  Bottom Layer w0.254: v1(121.183,51.587) 124.689,55.093 136.009,55.093 137.025,54.077 138.001,54.077 138.512,53.566 138.512,52.395 138.176,52.059 138.176,51.021 139.415,49.782 P3.61@139.415,49
NetR1_2: R1.2 R2.1 U8.4 | length 18.4
  Top Layer w0.254: R2.1@88.638,47.735 89.891,47.735 89.926,47.77 R1.2@91.188,47.77 91.188,45.972 95.733,41.427 97.765,41.427 98.83,42.493 98.83,45.77 U8.4@99.639,45.77
NetR3_1: R3.1 R4.2 U9.4 | length 10.2
  Top Layer w0.254: U9.4@104.569,45.6 109.291,45.6 109.97,46.279 R4.2@109.97,47.97 111.227,47.97 111.432,48.175 R3.1@112.7,48.175
NetR5_1: R5.1 U10.1 | length 2.3
  Top Layer w0.254: R5.1@67.578,47.78 68.178,47.18 U10.1@69.612,47.18
NetR5_2: R5.2 R6.1 U10.4 | length 15.5
  Top Layer w0.254: R6.1@62.148,47.685 R6.1@62.992,47.685 ; R5.2@64.678,47.78 63.443,47.78 63.348,47.685 R6.1@62.992,47.685 ; U10.4@72.012,45.28 71.222,45.28 71.222,46.533 70.51,47.244 70.51,47.906 69.446,48.971 63.043,48.971 62.992,48.92 R6.1@62.992,47.685
NetR7_1: R7.1 R8.2 U11.4 | length 12.7
  Top Layer w0.254: U11.4@76.761,45.22 77.724,45.22 78.207,45.703 78.207,48.463 78.486,48.743 82.398,48.743 R7.1@82.398,47.48 83.363,47.48 83.933,48.05 R8.2@84.923,48.05
NetR8_1: R8.1 U11.1 | length 13.2
  Top Layer w0.254: U11.1@74.361,47.12 75.006,47.12 75.819,46.307 75.819,44.704 76.378,44.145 82.144,44.145 83.148,45.15 R8.1@84.923,45.15
NetR10_1: R10.1 U12.8 | length 11.3
  Top Layer w0.254: R10.1@119.415,76.88 119.415,75.174 124.236,70.353 U12.8@126.975,70.353
NetR11_2: R11.2 U13.8 | length 7.4
  Top Layer w0.254: U13.8@92.758,89.053 92.735,89.053 92.735,82.525 93.49,82.525 R11.2@93.49,82.4
pads on no net: J1.1 P1.1 P1.2 P1.3 P1.4 P1.5 P1.6 P1.13 P1.14 P1.17 P1.18 P1.21 P1.23 P1.24 P1.33 P1.35 P1.36 P1.37 P1.38 P1.39 P1.40 P1.43 P1.44 P1.45 P1.46 P1.47 P1.48 P1.49 P1.50 P2.2 P2.4 P2.5 P2.6 P2.7 P2.8 P2.21 P2.22 P2.23 P2.24 P2.25 P2.26 P2.27 P2.29 P2.30 P2.31 P2.32 P2.33 P2.34 P2.35 P2.39 P2.40 P2.41 P2.42 P2.43 P2.49 P2.50 P3. P3.MP1 P3.MP2 U1.4 U1.6 U1.11 U2.4 U2.6 U2.11 U3.4 U3.6 U3.11 U4.4 U4.6 U4.11 U5.4 U5.6 U5.11 U6.6 U6.9 U7.5 U7.6 U7.9 U7.10 U12.5
copper on no net:
  other v2: 139.02,88.346

## Polygon pours and split planes (outlines as drawn)
GND on Bottom Layer "Bottom Layer-GND" (solid, pour order 8): 86.687,73.054 83.73,73.054 83.73,99.404 93.87,99.417 93.87,69.26 90.628,69.26
GND on Bottom Layer "Bottom Layer-GND 1" (solid, pour order 4): 93.67,77.38 93.67,69.26 108.68,69.26 108.7,69.28 108.7,77.44
GND on Bottom Layer "Bottom Layer-GND 2" (solid, pour order 0): 93.67,99.416 93.67,76.83 118.19,76.83 118.21,76.85 118.21,99.423
GND on Bottom Layer "Bottom Layer-GND 3" (solid, pour order 2): 94.12,88.66 94.12,92.25 92.95,92.25 92.95,88.64
no net on Mechanical 15 (solid): 92.79,91.39

## Other copper
Bottom Layer:
  region: 83.75,57.74

## Silkscreen, mask and mechanical layers (free items; w line width, h text height)
Top Overlay:
  drawing of 75 lines, arcs and shapes, not listed
  text "Designed by Andrew Pobrica" at 73.773,21.494 h0.62
  text "05/19/2019" at 80.563,19.91 h0.62